# Altium PCB Right_Board.PcbDoc (part 1 of 2)
Units mm, origin at the board's own origin, x right, y up, seen from the top; angles counter-clockwise.
Board outline 34.7 x 82.01 mm, 6 copper layers (Top Layer, Layer 2, Layer 3, Layer 4, Layer 5, Bottom Layer), stack 1.538 mm thick; 65 components, 45 nets, 288 pads, 262 vias.
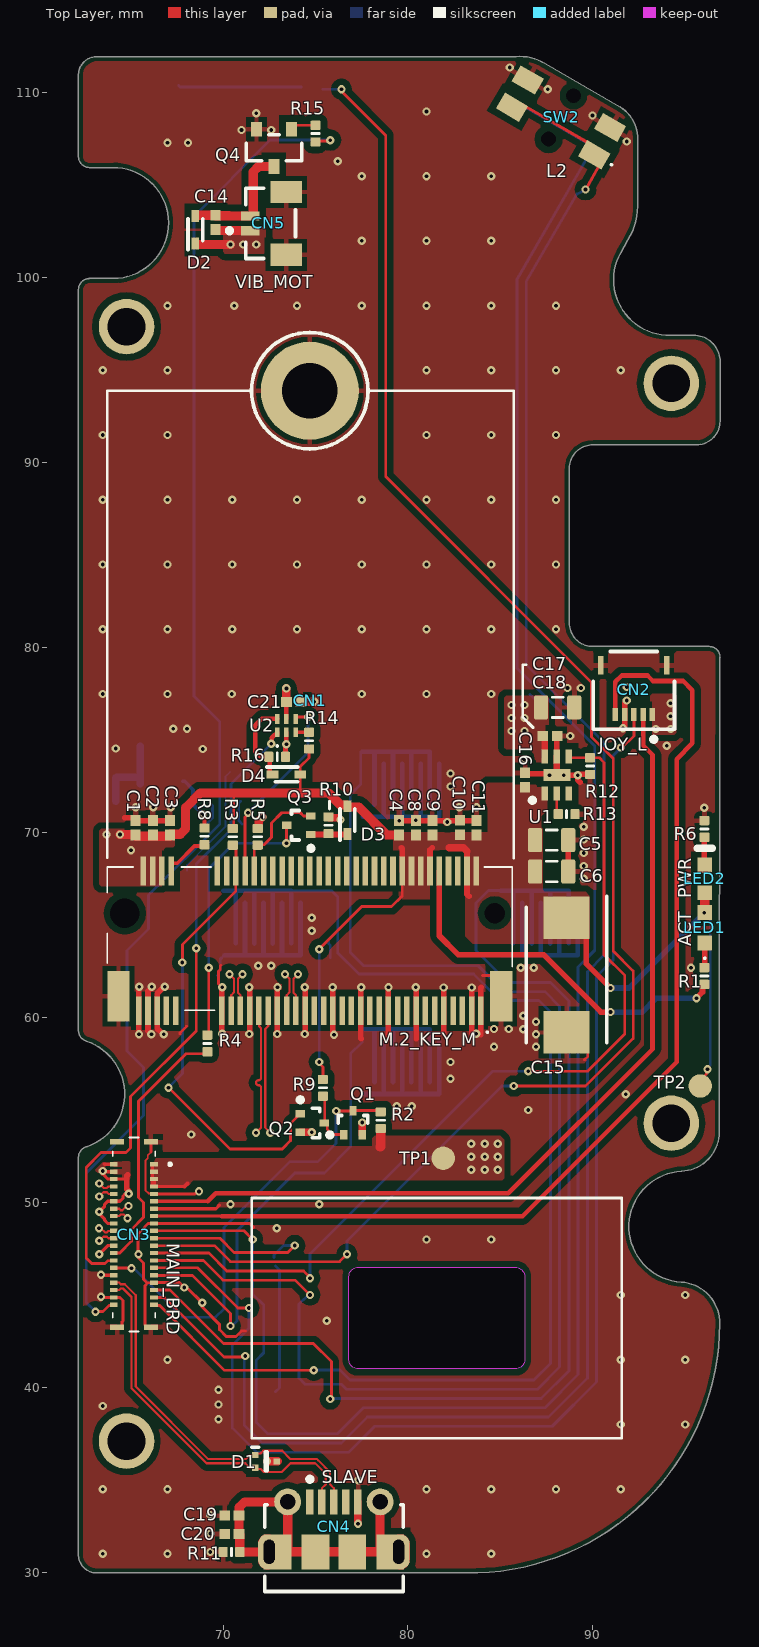
[diagram p0: Top Layer view]
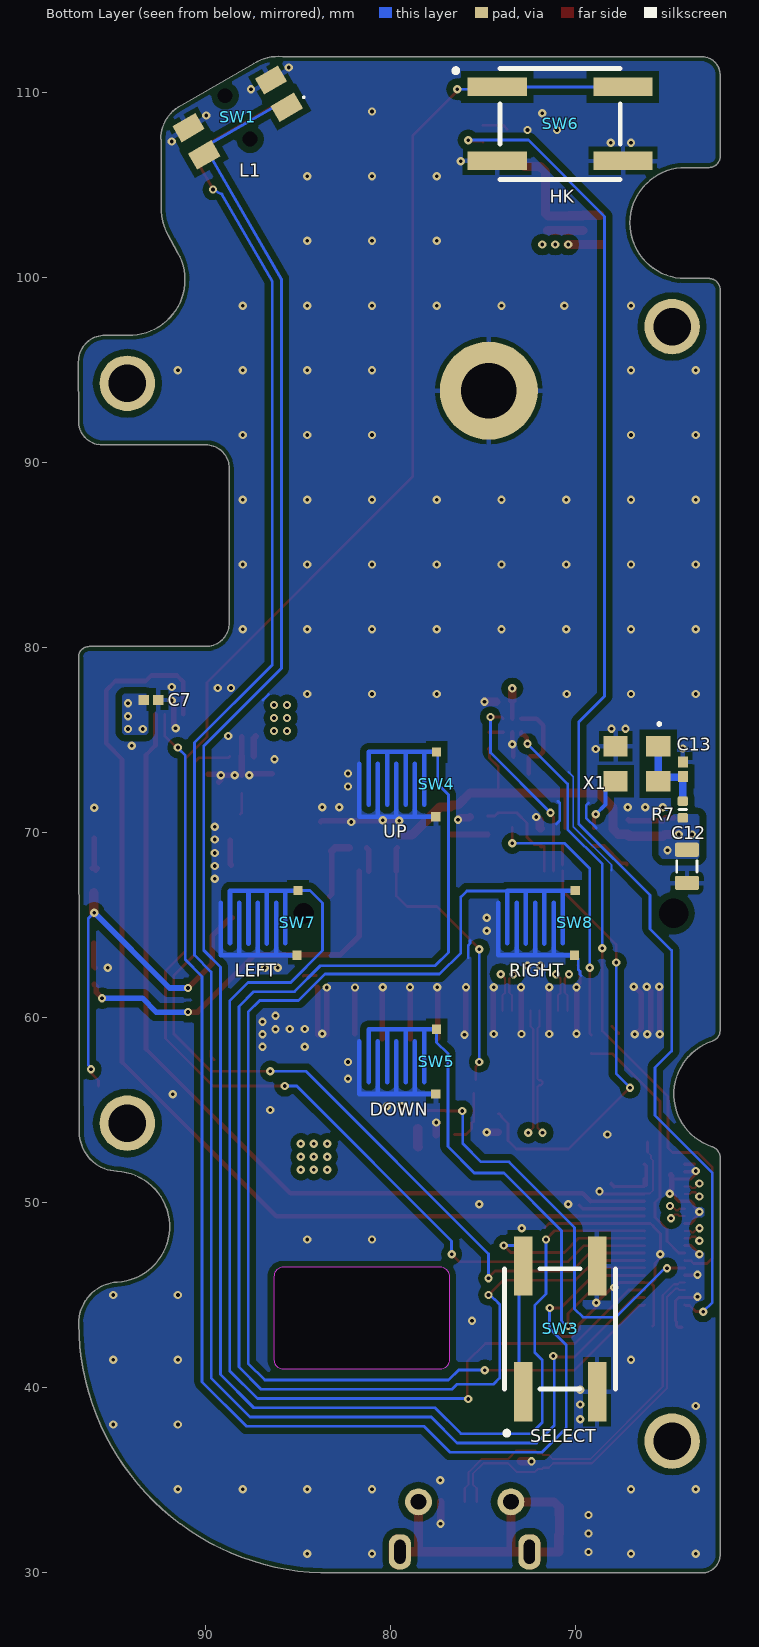
[diagram p1: Bottom Layer view, seen from below]
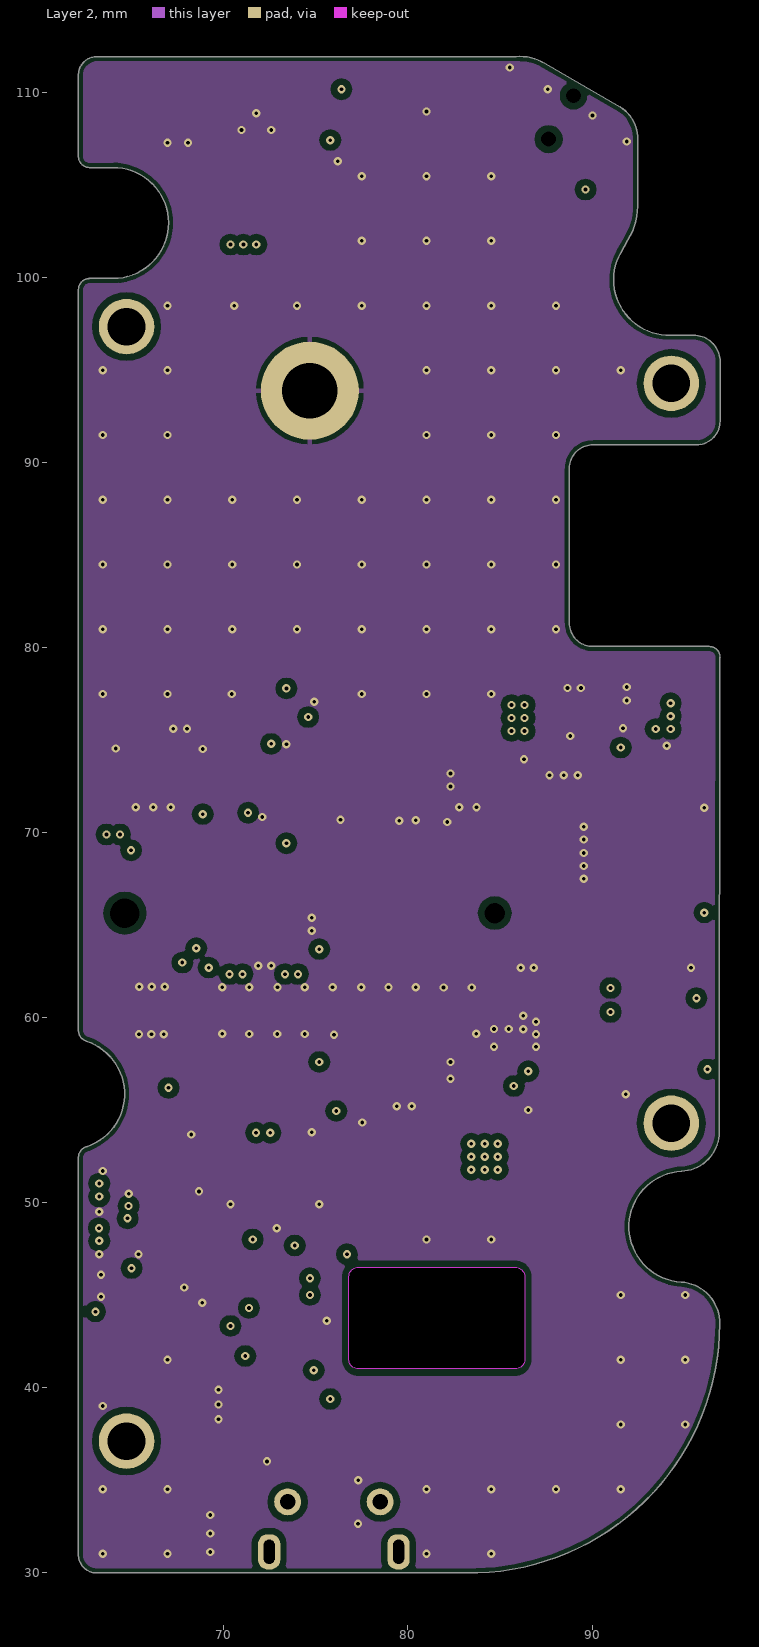
[diagram p2: Layer 2]
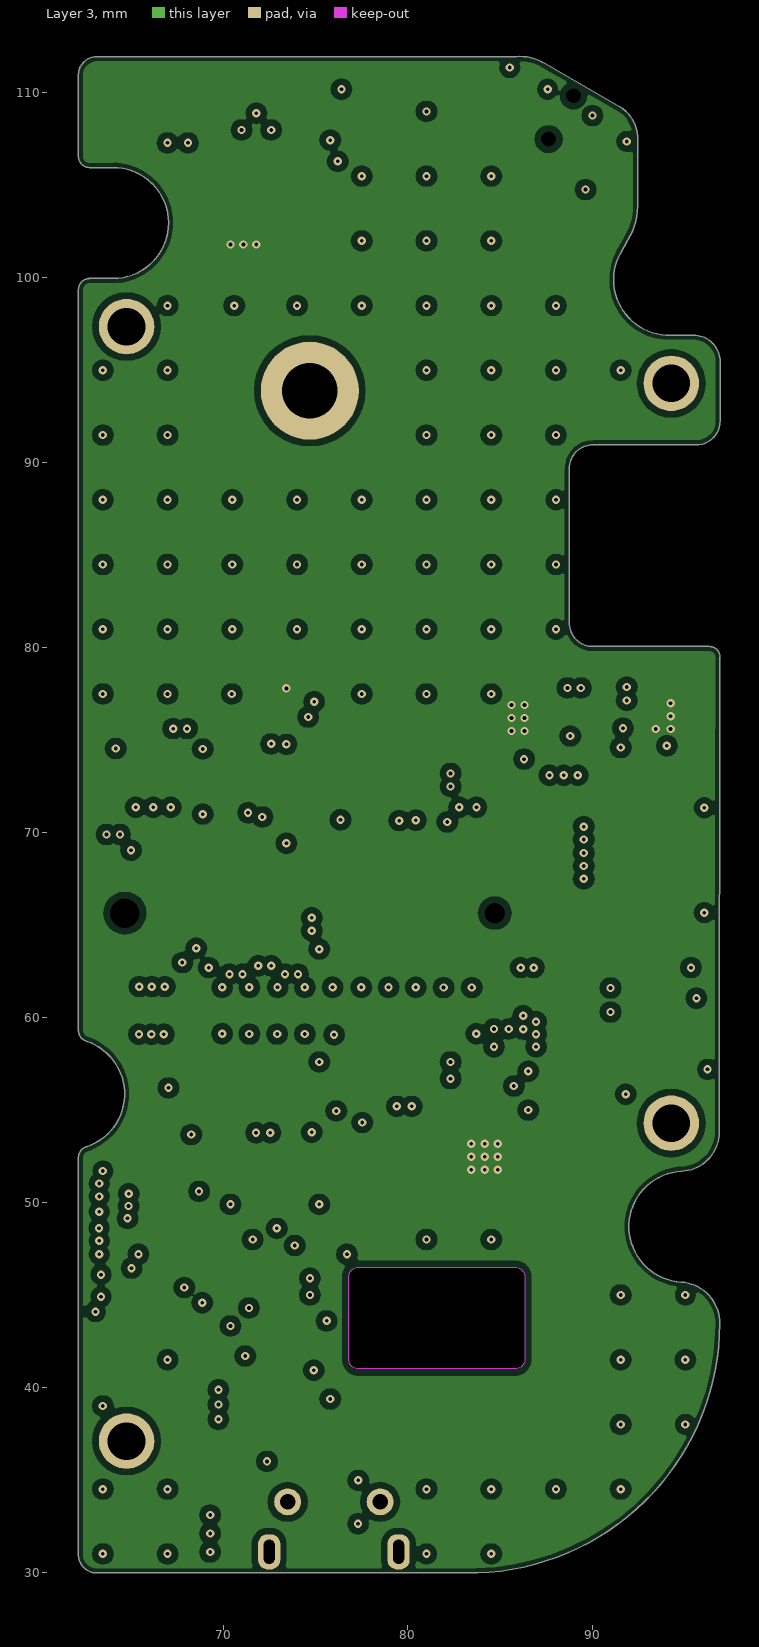
[diagram p3: Layer 3]
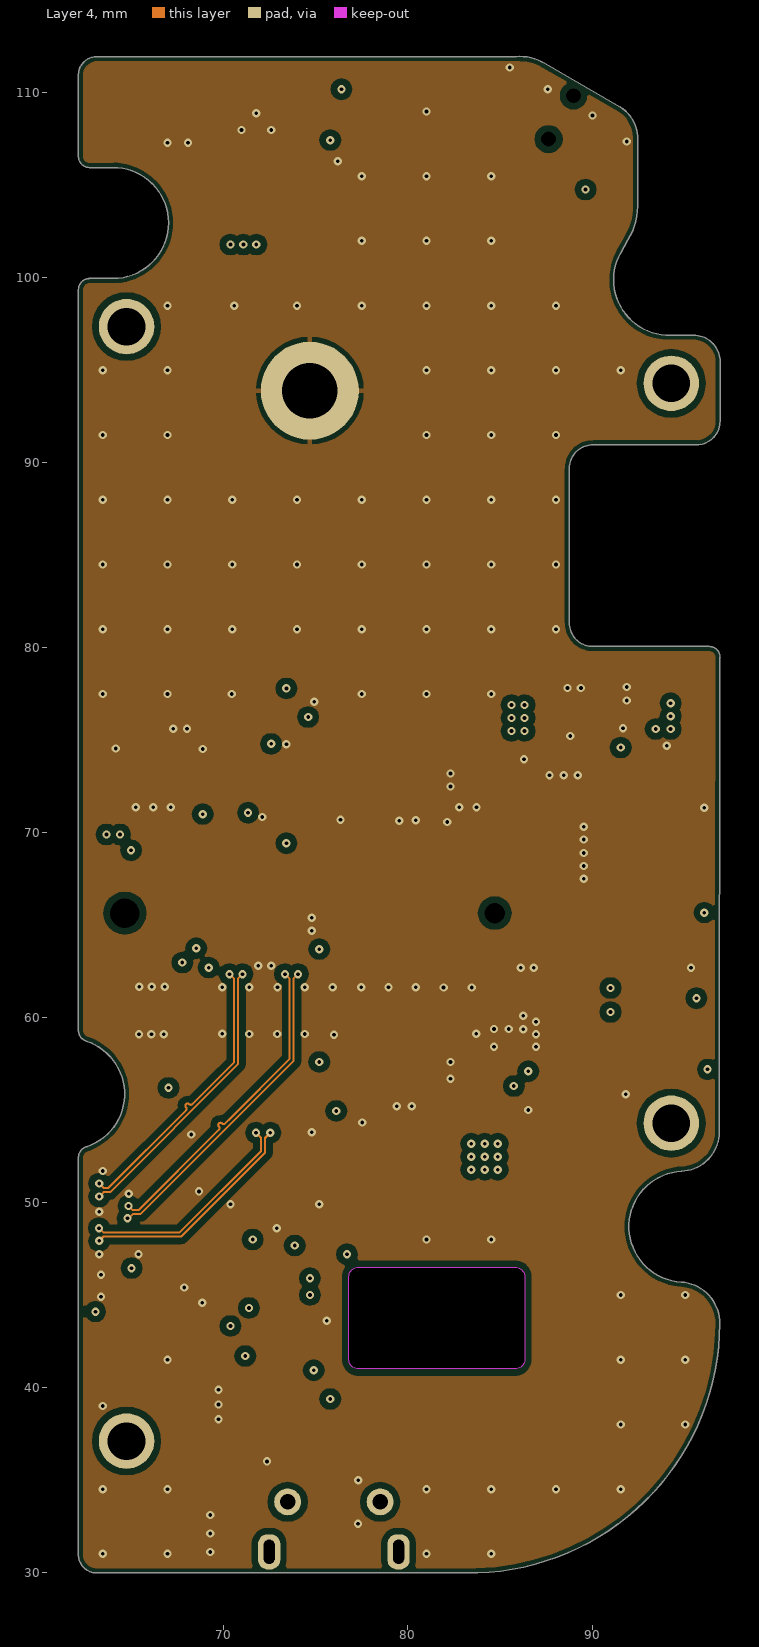
[diagram p4: Layer 4]
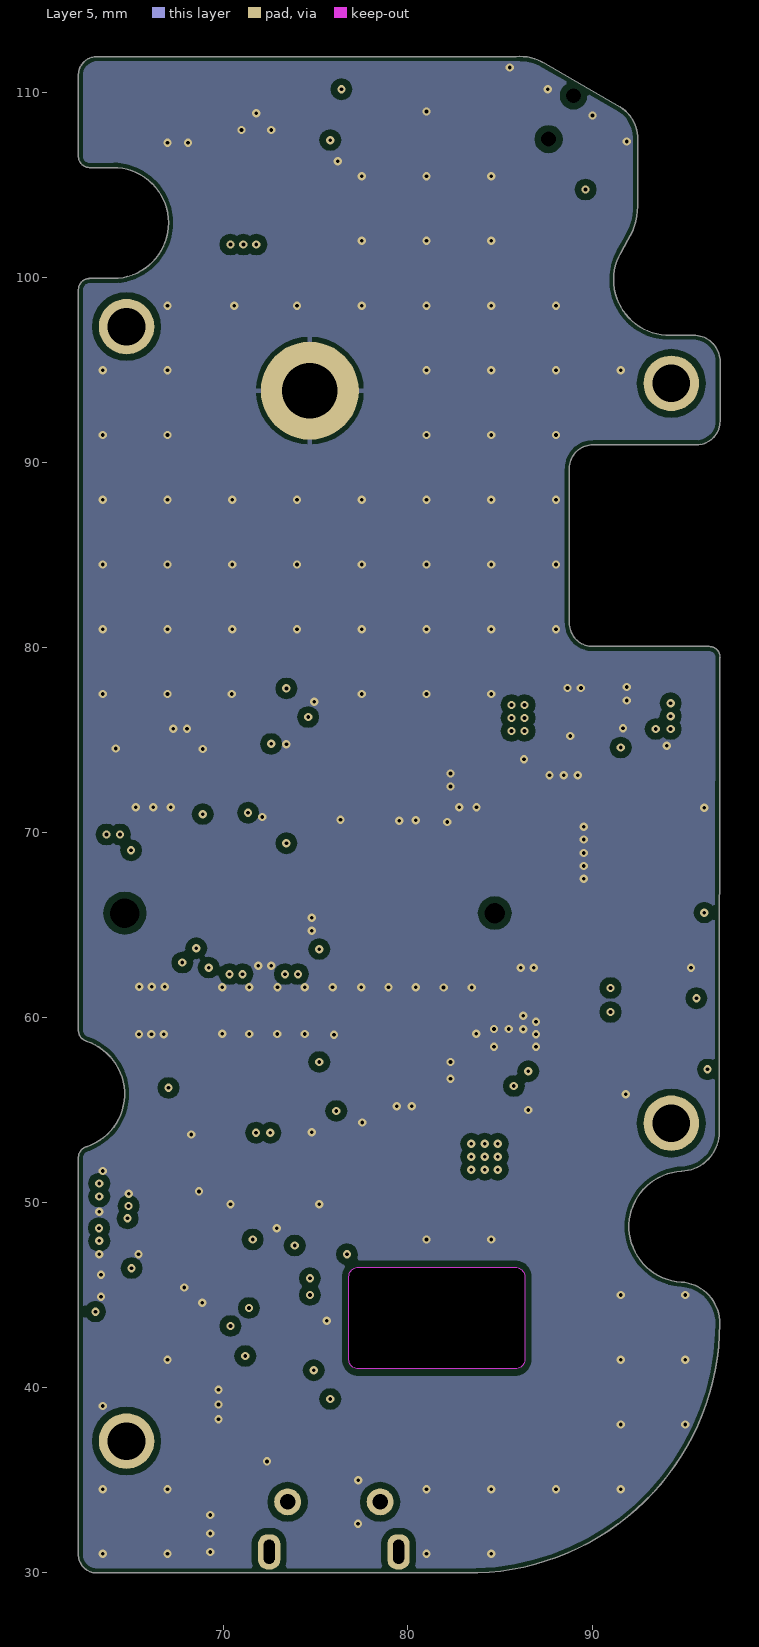
[diagram p5: Layer 5]
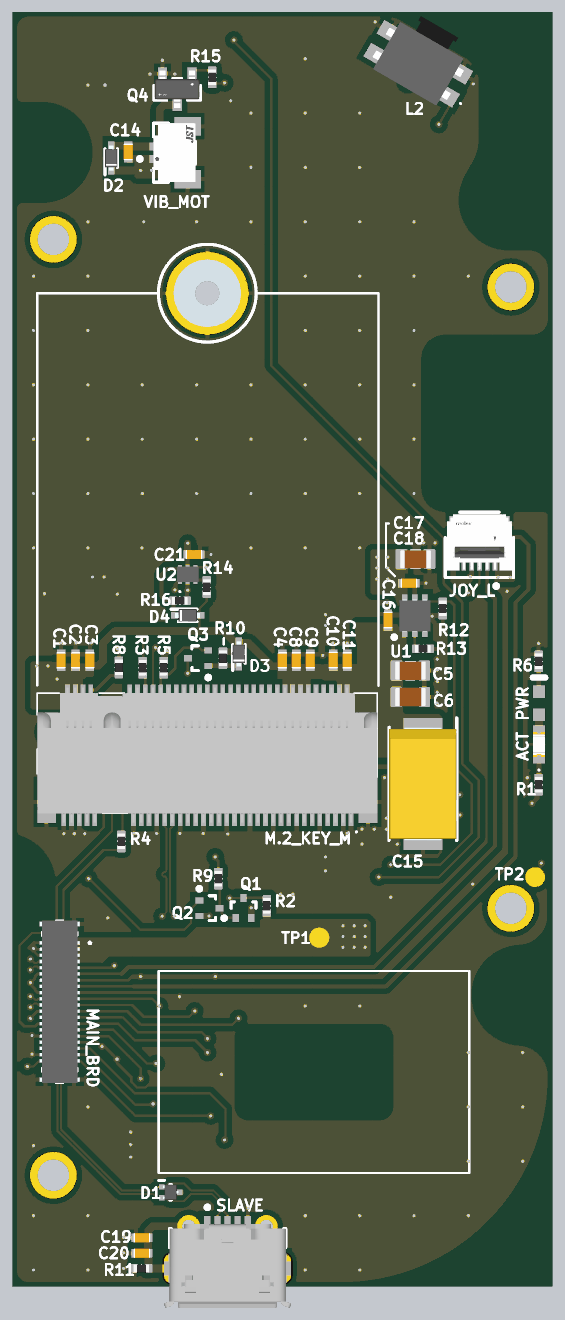
[diagram p7: 3D render of the assembled board from above, using the file's embedded part models]
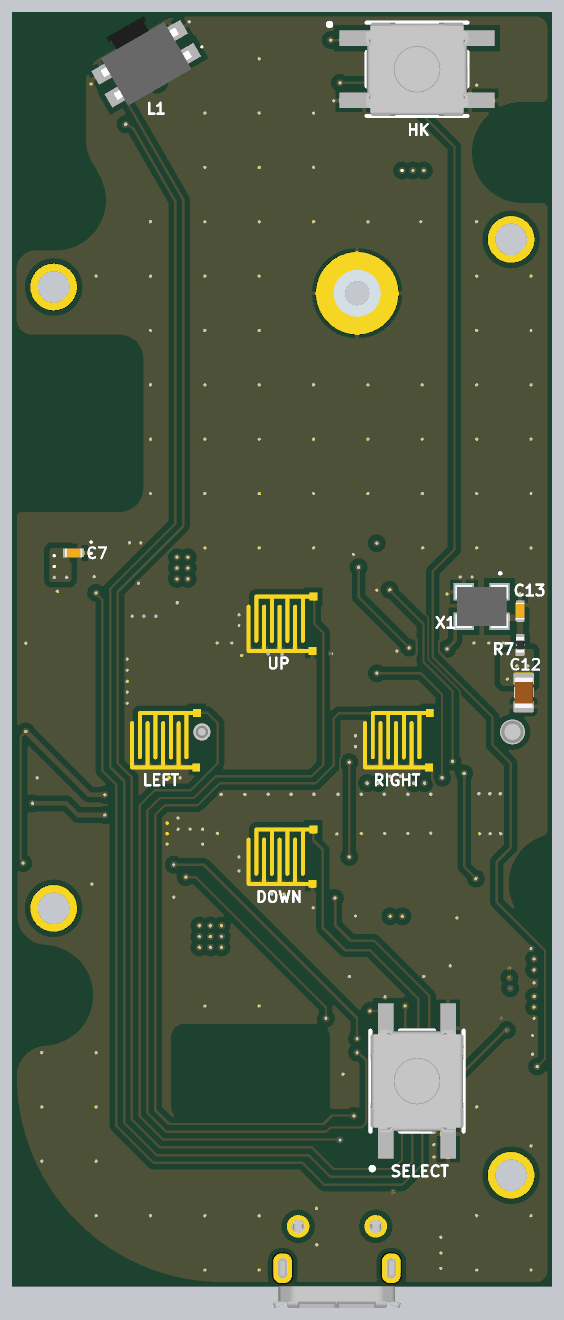
[diagram p8: 3D render of the assembled board from below, using the file's embedded part models]

## Layer stack, top to bottom
Top Solder: solder mask 0.0305, Solder Resist, Dk 3.8
Top Layer: signal copper 0.035
Dielectric 4: prepreg 0.0994, PP-015, Dk 4.1
Layer 2: signal copper 0.0152
Dielectric 2: core 0.55, Core-037, Dk 4.6
Layer 3: signal copper 0.0152
Dielectric 1: prepreg 0.1088, PP-016, Dk 4.1
Layer 4: signal copper 0.0152
Dielectric 3: core 0.55, Core-037, Dk 4.6
Layer 5: signal copper 0.0152
Dielectric 5: prepreg 0.0994, PP-015, Dk 4.1
Bottom Layer: signal copper 0.035
Bottom Solder: solder mask 0.0305, Solder Resist, Dk 3.8

## Board outline
62.181,52.466 cw(c62.785,52.435) 62.636,53.021 62.635,53.022 ccw(c61.679,55.866) 62.605,58.719 62.607,58.725 cw(c62.787,59.302) 62.183,59.268 62.179,59.272 62.179,99.381 cw(c62.784,99.36) 62.75,99.964 62.75,99.966 64.081,99.966 ccw(c64.054,102.966) 64.049,105.966 62.762,105.966 cw(c62.783,106.571) 62.179,106.537 62.179,111.004 62.18,111.004 cw(c63.179,110.967) 63.123,111.965 83.46,111.965 85.841,111.965 cw(c86.065,109.455) 87.399,111.593 91.47,109.242 cw(c90.401,107.53) 92.419,107.483 92.413,107.482 92.413,103.876 cw(c89.092,103.842) 91.884,102.043 91.882,102.044 91.499,101.355 ccw(c94.122,99.899) 94.206,96.9 94.206,96.899 95.442,96.899 cw(c95.442,95.461) 96.88,95.461 96.874,92.242 cw(c95.604,92.242) 95.604,90.972 89.992,90.972 ccw(c89.992,89.702) 88.722,89.703 88.722,81.338 ccw(c89.992,81.338) 89.992,80.068 96.291,80.067 cw(c96.297,79.49) 96.874,79.496 96.864,79.49 96.836,53.815 96.836,53.811 cw(c94.7,53.824) 94.785,51.69 94.79,51.69 ccw(c94.946,48.695) 94.78,45.699 94.783,45.699 cw(c94.626,43.468) 96.862,43.443 96.862,43.444 cw(c83.315,43.512) 83.133,29.966 63.14,29.966 cw(c63.177,30.965) 62.179,30.909 62.181,30.912
cut-out: 76.807,45.992 cw(c77.315,45.992) 77.315,46.5 85.799,46.5 cw(c85.799,45.992) 86.307,45.992 86.307,41.508 cw(c85.799,41.508) 85.799,41 77.315,41 cw(c77.315,41.508) 76.807,41.508

## Design rules (kind name [scope] priority, off if disabled: settings)
BoardOutlineClearance [All] p1: gap=0.254 ignorepadtopadclearanceinfootprint=FALSE except(0: Arc-OutlineEdge Arc-SplitContinuation Track-OutlineEdge Track-SplitContinuation SMDPad-OutlineEdge SMDPad-SplitContinuation THPad-SplitContinuation Via-OutlineEdge Via-SplitContinuation Fill-SplitContinuation Poly-SplitContinuation Region-OutlineEdge Region-SplitContinuation Text-OutlineEdge Text-SplitContinuation; 0.2: THPad-OutlineEdge)
Clearance [All] p1: gap=0.2 ignorepadtopadclearanceinfootprint=FALSE except(0.02: Fill-Hole; 0.09: Arc-Arc Arc-Track Track-Track; 0.127: SMDPad-SMDPad; 0.35: Arc-Fill Arc-Poly Arc-Region Track-Fill Track-Poly Track-Region SMDPad-Fill SMDPad-Poly SMDPad-Region THPad-Fill THPad-Poly THPad-Region Via-Fill Via-Poly Via-Region Fill-Fill Fill-Poly Fill-Region Poly-Poly Poly-Region Poly-Hole Region-Region)
ComponentClearance [All] p1: gap=0.15 collisioncheckmode=3 verticalgap=0.254 showdistances=FALSE
DiffPairsRouting PCIE [InDifferentialPairClass('PCIe Gen 3x1')] p1: maxlimit=0.254 minlimit=0.11 mostfreqgap=0.11 toplayer_maxgap=0.11 toplayer_minwidth=0.118 toplayer_maxwidth=0.118 toplayer_prefwidth=0.118 midlayer1_mingap=0.254 midlayer1_prefgap=0.254 midlayer1_minwidth=0.381 midlayer1_maxwidth=0.381 midlayer1_prefwidth=0.381 midlayer2_maxgap=0.11 midlayer2_minwidth=0.11 midlayer2_maxwidth=0.11 midlayer2_prefwidth=0.11 midlayer3_maxgap=0.11 midlayer3_minwidth=0.11 midlayer3_maxwidth=0.11 midlayer3_prefwidth=0.11 midlayer4_mingap=0.254 midlayer4_prefgap=0.254 midlayer4_minwidth=0.381 midlayer4_maxwidth=0.381 midlayer4_prefwidth=0.381 bottomlayer_maxgap=0.11 bottomlayer_minwidth=0.118 bottomlayer_maxwidth=0.118 bottomlayer_prefwidth=0.118 maxuncoupledlength=12.7
DiffPairsRouting HDMI_1 [InDifferentialPairClass('HDMI')] p2: maxlimit=0.254 minlimit=0.172 mostfreqgap=0.254 toplayer_maxgap=0.172 toplayer_prefgap=0.172 toplayer_minwidth=0.116 toplayer_maxwidth=0.116 toplayer_prefwidth=0.116 midlayer1_mingap=0.254 midlayer1_minwidth=0.381 midlayer1_maxwidth=0.381 midlayer1_prefwidth=0.381 midlayer2_mingap=0.174 midlayer2_maxgap=0.174 midlayer2_prefgap=0.174 midlayer2_minwidth=0.106 midlayer2_maxwidth=0.106 midlayer2_prefwidth=0.106 midlayer3_mingap=0.254 midlayer3_minwidth=0.381 midlayer3_maxwidth=0.381 midlayer3_prefwidth=0.381 midlayer4_mingap=0.254 midlayer4_minwidth=0.381 midlayer4_maxwidth=0.381 midlayer4_prefwidth=0.381 bottomlayer_maxgap=0.172 bottomlayer_prefgap=0.172 bottomlayer_minwidth=0.116 bottomlayer_maxwidth=0.116 bottomlayer_prefwidth=0.116 maxuncoupledlength=12.7
DiffPairsRouting USB [InDifferentialPairClass('USB 2.0')] p3: maxlimit=0.254 minlimit=0.11 mostfreqgap=0.254 toplayer_maxgap=0.11 toplayer_prefgap=0.11 toplayer_minwidth=0.118 toplayer_maxwidth=0.118 toplayer_prefwidth=0.118 midlayer1_mingap=0.254 midlayer1_minwidth=0.381 midlayer1_maxwidth=0.381 midlayer1_prefwidth=0.381 midlayer2_maxgap=0.11 midlayer2_prefgap=0.11 midlayer2_minwidth=0.11 midlayer2_maxwidth=0.11 midlayer2_prefwidth=0.11 midlayer3_mingap=0.254 midlayer3_minwidth=0.381 midlayer3_maxwidth=0.381 midlayer3_prefwidth=0.381 midlayer4_mingap=0.254 midlayer4_minwidth=0.381 midlayer4_maxwidth=0.381 midlayer4_prefwidth=0.381 bottomlayer_maxgap=0.11 bottomlayer_prefgap=0.11 bottomlayer_minwidth=0.118 bottomlayer_maxwidth=0.118 bottomlayer_prefwidth=0.118 maxuncoupledlength=12.7
HoleSize [All] p1: absolutevalues=TRUE maxlimit=3 minlimit=0.025 maxpercent=80.000 minpercent=20.000
HoleToHoleClearance [All] p1: gap=0.3 allowstackedmicrovias=TRUE
MatchedLengths PCIE_1 [InDifferentialPairClass('PCIe Gen 3x1')] p1: tolerance=0.127 checknetsindiffpair=TRUE checkdiffpairvsdiffpair=FALSE checkxsignals=FALSE checkothers=FALSE
MatchedLengths HDMI [InDifferentialPairClass('HDMI')] p2: tolerance=1.27 checknetsindiffpair=TRUE checkdiffpairvsdiffpair=FALSE checkxsignals=FALSE checkothers=FALSE
MatchedLengths "USB 2.0" [InDifferentialPairClass('USB 2.0')] p3: tolerance=1.27 checknetsindiffpair=TRUE checkdiffpairvsdiffpair=FALSE checkxsignals=FALSE checkothers=FALSE
MinimumSolderMaskSliver [All] p1: minsoldermaskwidth=0.1
PlaneClearance [All] p1: clearance=0.4
PolygonConnect GND [InNet('GND')] p1: thpad.connectstyle=Relief thpad.reliefconductorwidth=0.254 thpad.reliefentries=4 thpad.polygonreliefangle="90 Angle" thpad.airgapwidth=0.254 smdpad.connectstyle=Relief smdpad.reliefconductorwidth=0.254 smdpad.reliefentries=4 smdpad.polygonreliefangle="90 Angle" smdpad.airgapwidth=0.254 via.connectstyle=Direct via.reliefconductorwidth=0.254 via.reliefentries=4 via.polygonreliefangle="90 Angle" via.airgapwidth=0.254
PolygonConnect Other [All] p2: connectstyle=Direct reliefconductorwidth=0.254 reliefentries=4 polygonreliefangle="90 Angle" airgapwidth=0.254
RoutingCorners [All] p1: cornerstyle=Round minsetback=2.54 maxsetback=2.54
RoutingVias [All] p1: holewidth=0.2 width=0.45 viastyle="Through Hole" minholewidth=0.2 minwidth=0.45 maxholewidth=0.305 maxwidth=0.61
SilkToSilkClearance [All] p1: silktosilkclearance=0.05
SilkToSolderMaskClearance [IsPad] p1: minsilkscreentomaskgap=0.08 clearancetoexposedcopper=TRUE
SolderMaskExpansion [All] p1: expansion=0.01 istentingtop=FALSE
UnRoutedNet [All] p1: checkbadconnections=TRUE
Width [All] p1: maxlimit=4 minlimit=0.09 preferedwidth=0.175 toplayer_prefwidth=0.15 bottomlayer_prefwidth=0.15 minimp=50.000000 maximp=50.000000 favimp=50.000000
20 further rules are at their usual default settings.

## Classes and differential pairs
differential pair class "USB 2.0": E2
differential pair class "PCIe Gen 3x1": PCIE_CLK PCIE_RX PCIE_TX
differential pair PCIE_TX: +PCIE_TX_P -PCIE_TX_N
differential pair PCIE_RX: +PCIE_RX_P -PCIE_RX_N
differential pair PCIE_CLK: +PCIE_CLK_P -PCIE_CLK_N
differential pair E2: +E2_P -E2_N

## Components (designator, comment, footprint, x,y, rotation, side; value= is the part's Value field where it differs from the comment)
C1 "0.1uF" CAPC1005X56X25LL10T15 65.275,70.265 r90 top
C2 "0.1uF" CAPC1005X56X25LL10T15 66.2,70.265 r90 top
C3 "0.1uF" CAPC1005X56X25LL10T15 67.125,70.265 r90 top
C4 "0.1uF" CAPC1005X56X25LL10T15 79.525,70.265 r90 top
C5 "10uF" CAPC0805(2012)145_L 87.775,69.6 r0 top value=10µF
C6 "10uF" CAPC0805(2012)145_L 87.775,67.9 r0 top value=10µF
C7 "0.1uF" CAPC1005X56X25LL10T15 92.95,77.175 r180 bottom
C8 "0.1uF" CAPC1005X56X25LL10T15 80.425,70.265 r90 top
C9 "0.1uF" CAPC1005X56X25LL10T15 81.325,70.265 r90 top
C10 "0.1uF" CAPC1005X56X25LL10T15 82.8,70.275 r90 top
C11 "0.1uF" CAPC1005X56X25LL10T15 83.7,70.265 r90 top
C12 "10uF" CAPC0805(2012)145_L 63.975,68.175 r270 bottom value=10µF
C13 "0.1uF" CAPC1005X56X25LL10T15 64.2,73.425 r90 bottom
C14 "0.1uF" CAPC1005X56X25LL10T15 69.6,103 r90 top
C15 "150uF" CAPPM7344X310N 88.575,62.3 r270 top
C16 "0.1uF" CAPC1005X56X25LL10T15 86.325,72.85 r90 top
C17 "0.1uF" CAPC1005X56X25LL10T15 87.675,75.225 r0 top
C18 "10uF" CAPC0805(2012)145_L 88.1,76.775 r0 top value=10µF
C19 "0.1uF" CAPC1005X56X25LL10T15 70.475,33.075 r180 top
C20 "0.001uF" CAPC1005X56X25LL10T15 70.475,32.075 r180 top value=0.1uF
C21 "0.1uF" CAPC1005X56X25LL10T15 73.825,77.075 r0 top
CN1 "M.2_KEY_M" 121991196 74.79,78.624 r180 top locked
CN2 "JOY_L" FP-503480-0540-MFG 92.214,77.694 r180 top locked
CN3 "MAIN_BRD" BM20B0840DS04V51 65.182,48.266 r90 top locked
CN4 "SLAVE" 105017-0001 75.992,32.461 r0 top
CN5 "VIB_MOT" FP-SM02B-SURS-TF_LF_SN-MFG 72.571,102.947 r90 top
D1 "TPD2E009DRTR" SOTFL35P100X50-3N 72.325,36.004 r0 top
D2 "1SS400T1G" SODFL1608X70N 68.5,102.6 r90 top
D3 "1SS400T1G" SODFL1608X70N 76.725,70.675 r90 top
D4 "1SS400T1G" SODFL1608X70N 73.425,73.15 r0 top
LED1 "ACT" LED_0603 96.05,64.85 r0 top
LED2 "PWR" EVRL-0603-2_V 96.05,67.5 r90 top
Q1 "DMG1012T-7" DIOD-SOT523-3_V 77.024,54.307 r90 top
Q2 "DMG1012T-7" DIOD-SOT523-3_V 74.825,54.3 r0 top
Q3 "DMG1012T-7" DIOD-SOT523-3_V 74.1,70.4 r180 top
Q4 "SS8050-G" FP-SS8050-G-MFG 72.751,107.031 r270 top
R1 "1k" RESC0402(1005)_L 96.025,62.25 r90 top
R2 "2.2k" RESC0402(1005)_L 78.525,54.45 r90 top
R3 "10k" RESC0402(1005)_L 70.525,69.775 r270 top
R4 "33R" RESC0402(1005)_L 69.15,58.6 r270 top
R5 "2.2k" RESC0402(1005)_L 71.875,69.775 r90 top
R6 "1k" RESC0402(1005)_L 96.025,70.2 r270 top
R7 "1R" RESC0402(1005)_L 64.2,71.25 r90 bottom
R8 "33R" RESC0402(1005)_L 69,69.8 r270 top
R9 "10k" RESC0402(1005)_L 75.4,56.2 r270 top
R10 "10k" RESC0402(1005)_L 75.7,70.4 r90 top
R11 "1M" RESC0402(1005)_L 70.45,31.1 r180 top
R12 "100k" RESC0402(1005)_L 89.85,73.6 r90 top
R13 "10k" RESC0402(1005)_L 88.575,71 r0 top
R14 "10k" RESC0402(1005)_L 74.65,74.975 r270 top
R15 "1k" RESC0402(1005)_L 75,107.8 r90 top
R16 "10k" RESC0402(1005)_L 72.925,74.1 r0 top
SW1 "L1" APTCLGTVTR 88.275,108.675 r330 bottom
SW2 "L2" APTCLGTVTR_No_Holes 88.275,108.675 r150 top locked
SW3 "SELECT" EVQQ2 70.836,43.166 r90 bottom locked
SW4 "UP" L4.0-W4.0-CNDV-PAD#1 79.936,72.616 r180 bottom locked
SW5 "DOWN" L4.0-W4.0-CNDV-PAD#2 79.936,57.616 r180 bottom locked
SW6 "HK" EVQQ2 70.836,108.323 r180 bottom locked
SW7 "LEFT" L4.0-W4.0-CNDV-PAD#3 87.436,65.116 r180 bottom locked
SW8 "RIGHT" L4.0-W4.0-CNDV-PAD#4 72.436,65.116 r180 bottom locked
TP1 "3V3" TP 81.9,52.4 r0 top
TP2 "3V3M2" TP 95.8,56.3 r0 top
U1 "AP22653FDZ-7" SON65P200X200X80-7N-D 88.05,73.125 r90 top
U2 "74LVC1G3157FZ4-7" 74LVC1G3157FZ47 73.425,75.788 r0 top
X1 "ECS-327KE-TR" ECS327KETR 66.675,73.725 r0 bottom

## Footprints (in the part's own frame and the unit in brackets; to place one, negate y for a bottom-side part, rotate by r counter-clockwise, add the part's x,y. Pads: shape width x height; smd on the part's side, far side on the other; paste and mask are expansions set on the pad)
74LVC1G3157FZ47 [mm]
  rect 0.25x0.525 smd: 1(-0.5,-0.363) 2(0,-0.363) 3(0.5,-0.363) 4(0.5,0.363) 5(0,0.363) 6(-0.5,0.363)
  silkscreen extent -0.55,-1.15 -0.45,-1.05, body extent -0.7,-0.5 0.7,0.5, height 0.5
105017-0001 [mm]
  rect 0.4x1.35 smd: 1(-1.3,1.35) 2(-0.65,1.35) 3(0,1.35) 4(0.65,1.35) 5(1.3,1.35)
  round 1.45 hole 0.85: 6(-2.5,1.35)
  round 1.45 hole 0.85 paste+0: 7(2.5,1.35)
  rrect84% 1.2x1.9 hole 0.6 slot 1.3 at 90 deg mask+0.102: 8(-3.5,-1.35) 11(3.5,-1.35)
  rect 1.5x1.9 smd: 8(-3.05,-1.35) 9(-1,-1.35) 10(1,-1.35) 11(3.05,-1.35)
  Top Layer circle w0.5: c3.6,-0.9 r0.25
  Top Layer circle w0.5: c3.6,-1.8 r0.25
  Top Layer circle w0.5: c-3.6,-0.9 r0.25
  Top Layer circle w0.5: c-3.6,-1.8 r0.25
  Top Layer region: 3.6,-0.9 3.6,-1.8 4.1,-1.8 4.1,-0.9
  Top Layer region: -3.6,-1.8 -3.6,-0.9 -4.1,-0.9 -4.1,-1.8
  silkscreen extent -3.75,-3.5 3.75,2.7, body extent -4.1,-3.9 4.1,1.5, height 2.67
121991196 [mm]
  rect 0.3x1.55 smd: 1(-9.15,18.25) 2(-8.9,10.7) 3(-8.65,18.25) 4(-8.4,10.7) 5(-8.15,18.25) 6(-7.9,10.7) 7(-7.65,18.25) 8(-7.4,10.7) 9(-7.15,18.25) 10(-6.9,10.7) 11(-6.65,18.25) 12(-6.4,10.7) 13(-6.15,18.25) 14(-5.9,10.7) 15(-5.65,18.25) 16(-5.4,10.7) 17(-5.15,18.25) 18(-4.9,10.7) 19(-4.65,18.25) 20(-4.4,10.7) 21(-4.15,18.25) 22(-3.9,10.7) 23(-3.65,18.25) 24(-3.4,10.7) 25(-3.15,18.25) 26(-2.9,10.7) 27(-2.65,18.25) 28(-2.4,10.7) 29(-2.15,18.25) 30(-1.9,10.7) 31(-1.65,18.25) 32(-1.4,10.7) 33(-1.15,18.25) 34(-0.9,10.7) 35(-0.65,18.25) 36(-0.4,10.7) 37(-0.15,18.25) 38(0.1,10.7) 39(0.35,18.25) 40(0.6,10.7) 41(0.85,18.25) 42(1.1,10.7) 43(1.35,18.25) 44(1.6,10.7) 45(1.85,18.25) 46(2.1,10.7) 47(2.35,18.25) 48(2.6,10.7) 49(2.85,18.25) 50(3.1,10.7) 51(3.35,18.25) 52(3.6,10.7) 53(3.85,18.25) 54(4.1,10.7) 55(4.35,18.25) 56(4.6,10.7) 57(4.85,18.25) 58(5.1,10.7) 67(7.35,18.25) 68(7.6,10.7) 69(7.85,18.25) 70(8.1,10.7) 71(8.35,18.25) 72(8.6,10.7) 73(8.85,18.25) 74(9.1,10.7) 75(9.35,18.25)
  round 0.55 hole 1.1 unplated mask+0.038: MH1(-9.9,12.975)
  round 0.8 hole 1.6 unplated mask+0.038: MH2(10.1,12.975)
  rect 1.2x2.75 smd: MP1(-10.25,17.474) MP2(10.45,17.474)
  round 5.3 hole 3 mask+0.038: MP3(0.1,-15.275)
  silkscreen extent -10.93,-18.42 11.05,19.46, body extent -10.85,-17.44 11.05,18.82, height 3.08
APTCLGTVTR [mm]
  rect 1.45x1 smd: 1(-2.575,0.85) 2(-2.575,-0.85) 3(2.575,0.85) 4(2.575,-0.85)
  round 0.4 hole 0.8 unplated mask+0.038: MH1(0,1.35) MH2(0,-1.35)
  silkscreen extent -3.69,0.8 -3.59,0.9, body extent -2.77,-2.75 2.77,1.75, height 1.67
APTCLGTVTR_No_Holes [mm]
  rect 1.45x1 smd: 1(-2.574,0.85) 2(-2.574,-0.85) 3(2.576,0.85) 4(2.576,-0.85)
  silkscreen extent -3.69,0.8 -3.59,0.9, body extent -2.77,-2.75 2.77,1.75, height 1.67
BM20B0840DS04V51 [mm]
  rect 0.23x0.42 smd: 1(3.8,-1.09) 2(3.8,1.09) 3(3.4,-1.09) 4(3.4,1.09) 5(3,-1.09) 6(3,1.09) 7(2.6,-1.09) 8(2.6,1.09) 9(2.2,-1.09) 10(2.2,1.09) 11(1.8,-1.09) 12(1.8,1.09) 13(1.4,-1.09) 14(1.4,1.09) 15(1,-1.09) 16(1,1.09) 17(0.6,-1.09) 18(0.6,1.09) 19(0.2,-1.09) 20(0.2,1.09) 21(-0.2,-1.09) 22(-0.2,1.09) 23(-0.6,-1.09) 24(-0.6,1.09) 25(-1,-1.09) 26(-1,1.09) 27(-1.4,-1.09) 28(-1.4,1.09) 29(-1.8,-1.09) 30(-1.8,1.09) 31(-2.2,-1.09) 32(-2.2,1.09) 33(-2.6,-1.09) 34(-2.6,1.09) 35(-3,-1.09) 36(-3,1.09) 37(-3.4,-1.09) 38(-3.4,1.09) 39(-3.8,-1.09) 40(-3.8,1.09)
  rect 0.3x0.75 smd: MP1(5.01,-0.925) MP2(5.01,0.925) MP3(-5.01,-0.925) MP4(-5.01,0.925)
  silkscreen extent -5.25,-2 5.25,1.15, body extent -5.24,-1.28 5.24,1.28, height 1
CAPC0805(2012)145_L [mm] "Chip Capacitor, Body 2.0x1.2mm, Height 1.45mm, IPC High Density"
  rrect25% 0.76x1.3 smd: 1(-0.9,0) 2(0.89,0)
  silkscreen extent -0.3,-0.55 0.3,0.55, body extent -1,-0.6 1,0.6, height 1.45
CAPC1005X56X25LL10T15 [mm] "Chip Capacitor, 2-Leads, Body 1.10x0.60mm, IPC High Density"
  rect 0.58x0.54 smd: 1(-0.39,0) 2(0.39,0)
  body extent -0.55,-0.3 0.55,0.3, height 0.56
CAPPM7344X310N [mm]
  rect 2.3x2.5 smd: 1(-3.1,0) 2(3.1,0)
  silkscreen extent -4.25,-2.17 3.65,2.17, body extent -3.65,-2.17 3.65,2.17, height 3.1
DIOD-SOT523-3_V [mm] "SOT523, 3-Leads, Body 1.6x0.8mm, Pitch 0.50mm"
  rect 0.51x0.4 smd: 1(-0.65,0.5) 2(-0.65,-0.5) 3(0.65,0)
  silkscreen extent -0.77,-0.8 0.4,1.37, body extent -0.4,-0.8 0.4,0.8, height 0.86
ECS327KETR [mm]
  rect 1.3x1.1 smd: 1(-1.15,-0.95) 2(1.15,-0.95) 3(1.15,0.95) 4(-1.15,0.95)
  silkscreen extent -1.25,-2.2 -1.15,-2.1, body extent -1.69,-1.39 1.69,1.39, height 1.1
EVQQ2 [mm]
  rect 3.2x1 smd: 1(-3.4,2) 2(-3.4,-2) 3(3.4,-2) 4(3.4,2)
  silkscreen extent -5.75,-3 3.25,3, body extent -3.3,-3 3.3,3, height 3.1
EVRL-0603-2_V [mm] "SMD, 2-Leads, Body 1.6x0.8mm"
  rect 0.8x0.8 smd: 1(-0.75,0) 2(0.75,0)
  silkscreen extent 1.65,-0.4 1.65,0.4, body extent -0.8,-0.4 0.8,0.4, height 0.5
FP-503480-0540-MFG [mm]
  rect 0.3x0.7 smd paste+0: 1(-1,1.3) 2(-0.5,1.3) 3(0,1.3) 4(0.5,1.3) 5(1,1.3)
  rect 0.3x1 smd paste+0: 6(-1.79,-1.35) 7(1.79,-1.35)
  silkscreen extent -2.2,-2.1 2.2,2.77, body extent -2.3,-2.2 2.3,2.2, height 0.25
FP-SM02B-SURS-TF_LF_SN-MFG [mm]
  rect 0.5x1 smd paste+0: 1(-0.4,1.1) 2(0.4,1.1)
  rect 1.2x1.7 smd paste+0: 3(-1.7,-0.85) 4(1.7,-0.85)
  silkscreen extent -1.9,-1.35 1.9,2.35, body extent -2.4,-1.8 2.4,1.7, height 0.25
FP-SS8050-G-MFG [mm]
  rect 0.8x0.6 smd paste+0: 1(-1.01,0.95) 2(-1.01,-0.95) 3(1.01,0)
  silkscreen extent -0.7,-1.5 0.7,1.5, body extent -1.51,-1.6 1.51,1.6, height 0.25
L4.0-W4.0-CNDV-PAD#1 [mm] "Conductive Pad Switch"
  rect 0.5x0.5 smd paste-2539.97: 1(2.425,1.75) 2(2.375,-1.75)
  Top Layer lines w0.25: 2.425,1.75 1.75,1.75 ; 2.375,-1.75 2.125,-1.75 1.25,-1.75 ; 1.75,-1.1 1.75,1.75 ; 1.25,1.1 1.25,-1.75 ; 0.75,-1.107 0.75,1.75 ; 0.25,1.1 0.25,-1.75 ; -0.25,-1.107 -0.25,1.75 ; -0.75,1.1 -0.75,-1.75 ; -1.25,-1.1 -1.25,1.75 -0.25,1.75 ; -1.75,1.1 -1.75,-1.75 -0.75,-1.75 ; 1.75,1.75 0.75,1.75 ; 1.25,-1.75 0.411,-1.75 0.25,-1.75 ; 0.75,1.75 -0.25,1.75 ; 0.25,-1.75 -0.489,-1.75 -0.75,-1.75
L4.0-W4.0-CNDV-PAD#2 [mm] "Conductive Pad Switch"
  rect 0.5x0.5 smd paste-2539.97: 1(2.425,1.75) 2(2.375,-1.75)
  Top Layer lines w0.25: 2.425,1.75 2.386,1.75 1.75,1.75 ; 2.375,-1.75 2.125,-1.75 -1.75,-1.75 -1.75,1.1 ; 1.75,-1.1 1.75,1.75 ; 1.25,-1.75 1.25,1.1 ; 0.75,-1.107 0.75,1.75 ; 0.25,-1.75 0.25,1.1 ; -0.25,-1.107 -0.25,1.75 ; -0.75,-1.75 -0.75,1.1 ; -1.25,-1.1 -1.25,1.75 -0.25,1.75 ; 1.75,1.75 0.75,1.75 ; 0.75,1.75 -0.25,1.75
L4.0-W4.0-CNDV-PAD#3 [mm] "Conductive Pad Switch"
  rect 0.5x0.5 smd paste-2539.97: 1(2.425,1.75) 2(2.375,-1.75)
  Top Layer lines w0.25: 2.425,1.75 -1.25,1.75 -1.25,-1.1 ; 2.375,-1.75 2.125,-1.75 -1.75,-1.75 -1.75,1.1 ; 1.75,-1.1 1.75,1.75 ; 1.25,-1.75 1.25,1.1 ; 0.75,-1.107 0.75,1.75 ; 0.25,-1.75 0.25,1.1 ; -0.25,-1.107 -0.25,1.75 ; -0.75,-1.75 -0.75,1.1
L4.0-W4.0-CNDV-PAD#4 [mm] "Conductive Pad Switch"
  rect 0.5x0.5 smd paste-2539.97: 1(2.425,1.75) 2(2.375,-1.75)
  Top Layer lines w0.25: 2.425,1.75 1.75,1.75 ; 2.375,-1.75 2.125,-1.75 -1.75,-1.75 -1.75,1.1 ; 1.75,-1.1 1.75,1.75 ; 1.25,-1.75 1.25,1.1 ; 0.75,-1.107 0.75,1.75 ; 0.25,-1.75 0.25,1.1 ; -0.25,-1.107 -0.25,1.75 ; -0.75,-1.75 -0.75,1.1 ; -1.25,-1.1 -1.25,1.734 -1.25,1.75 -1.089,1.75 -0.25,1.75 ; 1.75,1.75 0.75,1.75 ; 0.75,1.75 -0.25,1.75
LED_0603 [mm]
  rect 0.8x0.8 smd: 1(0,0.825) 2(0,-0.825)
  silkscreen extent -0.05,-1.7 0.05,-1.6, body extent -0.4,-0.8 0.4,0.8, height 0.55
RESC0402(1005)_L [mm] "Chip Resistor, Body 1.0x0.5mm, IPC High Density"
  rrect25% 0.5x0.55 smd: 1(-0.45,0) 2(0.45,0)
  silkscreen extent 0,-0.2 0,0.2, body extent -0.5,-0.25 0.5,0.25, height 0.3
SODFL1608X70N [mm]
  rect 0.64x0.42 smd: 1(-0.75,0) 2(0.75,0)
  silkscreen extent -1.07,-0.4 0.6,0.4, body extent -0.8,-0.4 0.8,0.4, height 0.7
SON65P200X200X80-7N-D [mm]
  rect 0.75x0.35 smd: 1(-1,0.65) 2(-1,0) 3(-1,-0.65) 4(1,-0.65) 5(1,0) 6(1,0.65)
  rect 0.65x1.45 smd: 7(0,0)
  silkscreen extent -1.5,1.2 -1.25,1.45, body extent -1.05,-1 1.05,1, height 0.8
SOTFL35P100X50-3N [mm]
  rect 0.36x0.33 smd: 1(-0.58,0.35) 2(-0.58,-0.35) 3(0.58,0)
  silkscreen extent -0.76,-0.5 0.05,0.76, body extent -0.5,-0.5 0.5,0.5, height 0.5
TP [mm]
  round 1.27 smd paste-2539.97: 1(0,0)

## Part data
C1 C2 C3 C4 C7 C8 C9 C10 C11 C13 C14 C16 C17 C19 C20 C21: library part CMP-001-00001-6, "Chip Capacitor, 0.1 uF, +/- 5%, 16 V, 0402 (1005 Metric)", Capacitor Type=Ceramic, Case/Package=0402, Max Operating Temperature=125°C, Min Operating Temperature=-55°C, Tolerance=5%, Voltage Rating=16V, Mounting Technology=SM, Pins=2, RoHS Compliant=True
C5 C6 C12 C18: library part CMP-001-00079-4, "Chip Capacitor, 10µF +/-20%, 25V, 0805, Thickness 1.45 mm", Case/Package=0805, Max Operating Temperature=85°C, Min Operating Temperature=-55°C, Tolerance=10%, Voltage Rating=25V, Mounting Technology=SMT, Pins=2
C15: library part TPSD157K016S0125, "Capacitor Polarised", Manufacturer_Name=AVX, Mouser Part Number=581-TPSD157K016S0125, Arrow Part Number=TPSD157K016S0125, Arrow Price/Stock=https://www.arrow.com/en/products/tajd157k016rnjv/avx, Datasheet Link=http://datasheets.avx.com/TAJ.pdf, Height=3.1mm, Manufacturer_Part_Number=TPSD157K016S0125, Mouser Price/Stock=https://www.mouser.co.uk/ProductDetail/AVX/TAJD157K016RNJV?qs=%252BZP6%2F%252BtExtCxiQ2tCar1OQ%3D%3D, Supplier 1=Mouser, Supplier Part Number 1=581-TPSD157K016S0125
CN1: library part 1-2199119-6, "M.2 PCIE KEY M Connector", Manufacturer_Name="TE Connectivity", Mouser Part Number=571-1-2199119-6, Arrow Part Number=1-2199119-6, Arrow Price/Stock=https://www.arrow.com/en/products/1-2199119-6/te-connectivity?region=nac, Datasheet Link=https://www.te.com/commerce/DocumentDelivery/DDEController?Action=showdoc&DocId=Customer+Drawing%7F2199119%7FF%7Fpdf%7FEnglish%7FENG_CD_2199119_F.pdf%7F1-2199119-6, Height=3.2mm, Manufacturer_Part_Number=1-2199119-6, Mouser Price/Stock=https://www.mouser.co.uk/ProductDetail/TE-Connectivity/1-2199119-6?qs=I%252B29QTDM1GM6Cv1M63DAwA%3D%3D, Supplier 1=Mouser, Supplier Part Number 1=571-1-2199119-6
CN2: library part CMP-00257-52963780-1, "503480-0540 Connector FFC/FPC SKT 5 Position 0.5mm Solder Right Angle Surface Mount T/R", Current Rating=500mA, Flammability Rating="UL94 V-0", Manufacturer Lifecycle Status=ACTIVE, Max Operating Temperature=85°C, Min Operating Temperature=-40°C, Voltage Rating=50V, Actuator Material="Glass, Nylon, Polyamide", Contact Material="Bronze, Gold, Nickel", Contact Plating=Gold, Country of Origin=KR, Halogen Free="Low Halogen", Height=2.07mm, Housing Material=Polymer, Lifecycle Status=Production, Mount="Surface Mount", NexarPartId=52963780, Number of Circuits=5, Number of Contacts=5, Number of Positions=5, Number of Rows=1, Orientation="Right Angle", Pitch=508µm, Plating=Gold, RoHS=Compliant, Termination=Solder, Wire/Cable Type=Straight
CN3: library part BM20B(0.8)-40DS-0.4V(51), "Connector", Manufacturer_Name=Hirose, Mouser Part Number=798-BM20B0840DS04V51, Datasheet Link=https://datasheet.datasheetarchive.com/originals/distributors/Datasheets-DGA17/1065509.pdf, Height=0.9mm, Manufacturer_Part_Number=BM20B(0.8)-40DS-0.4V(51), Mouser Price/Stock=https://www.mouser.co.uk/ProductDetail/Hirose-Connector/BM20B0.8-40DS-0.4V51?qs=AAveGqk956F9p8KJryTUVg%3D%3D, Supplier 1=Mouser, Supplier Part Number 1=798-BM20B0840DS04V51, System=Connector
CN4: library part 105017-0001, "Micro USB Connector", Manufacturer_Name=Molex, Mouser Part Number=538-105017-0001, Manufacturer_Part_Number=105017-0001, Supplier 1=Mouser, Supplier 2=Digikey, Supplier Part Number 1=538-105017-0001, Supplier Part Number 2=WM1399CT-ND
CN5: library part CMP-17439-000279-1, "LCSC_CONN HEADER SMD R/A 2POS 0.8MM", Color=Natural, Current Rating=500mA, Flammability Rating="UL94 V-0", Max Operating Temperature=85°C, Min Operating Temperature=-25°C, Voltage Rating=30V, Body Plating=Tin, Connector Type=Header, Contact Finish - Mating=TIN, Contact Material="Copper Alloy", Contact Plating=Tin, Contact Shape=Rectangular, Contact Type="Outer Shroud Contact", Fastening Type=Pull, Gender=Male, Insulation Color=Natural, Insulation Material=Nylon, Lead Free="Lead Free", Lead Pitch=0.8mm, Material=Polyamide, Mount="Surface Mount", Number of Contacts=2, Number of Poles=2, Number of Positions=2, Number of Rows=1, Orientation=Horizontal, Packaging="Cut Tape", Pitch=0.8mm, REACH SVHC="No SVHC", Series=SUR, Termination=Solder, Wire/Cable Gauge=32AWG, Working Voltage=30V
D1: "Integrated Circuit", Manufacturer_Name="Texas Instruments", Mouser Part Number=595-TPD2E009DRTR, Arrow Part Number=TPD2E009DRTR, Arrow Price/Stock=https://www.arrow.com/en/products/tpd2e009drtr/texas-instruments?region=nac, Datasheet Link=https://www.ti.com/lit/ds/symlink/tpd2e009.pdf?ts=1621336941637&ref_url=https%253A%252F%252Fwww.google.com%252F, Height=0.5mm, Manufacturer_Part_Number=TPD2E009DRTR, Mouser Price/Stock=https://www.mouser.co.uk/ProductDetail/Texas-Instruments/TPD2E009DRTR?qs=XGzIaZb%2FFYLhG8oL%2FM05Rg%3D%3D
D2 D3 D4: "Diode", Manufacturer_Name=onsemi, Mouser Part Number=863-1SS400T1G, Arrow Part Number=1SS400T1G, Arrow Price/Stock=https://www.arrow.com/en/products/1ss400t1g/on-semiconductor?region=nac, Datasheet Link=http://www.onsemi.com/pub/Collateral/1SS400T1-D.PDF, Height=0.7mm, Manufacturer_Part_Number=1SS400T1G, Mouser Price/Stock=https://www.mouser.co.uk/ProductDetail/onsemi/1SS400T1G?qs=vLkC5FC1VN8%2F6DEK%2F5shrw%3D%3D, Supplier 1=Mouser, Supplier Part Number 1=863-1SS400T1G
LED1: library part BZ-C0603-K4-E1, MPN=BZ-C0603-K4-E1
LED2: library part CMP-2100-03578-1, "Chip LED, Red, 5 V, 25 mA, -40 to 85 degC, 2-Pin SMD (0603), RoHS, Tape and Reel", Case/Package=0603, Color=Red, Forward Current=25mA, Forward Voltage=2.2V, Manufacturer="Everlight Electronics", Manufacturer Part Number=19-217/R6C-AL1M2VY/3T, Max Operating Temperature=85°C, Min Operating Temperature=-40°C, Package Description="2-Pin Surface Mount Device, Body 1.6 x 0.8 mm", Supplier Part Number=1080-1585-6-ND, Category=LEDs, Channels=1, Colour=Red, ComponentLink1Description=https://datasheet.ciiva.com:443/pdfs/VipMasterIC/IC/EVER/EVER-S-A0007433843/EVER-S-A0007433843-1.pdf?src-supplier=IHS+Markit, ComponentLink1URL=https://datasheet.ciiva.com:443/pdfs/VipMasterIC/IC/EVER/EVER-S-A0007433843/EVER-S-A0007433843-1.pdf?src-supplier=IHS+Markit, ComponentLink2Description=https://media.digikey.com/pdf/Data%20Sheets/Everlight%20PDFs/19-217-R6C-AL1M2VY-3T.pdf?src-supplier=Digikey, ComponentLink2URL=https://media.digikey.com/pdf/Data%20Sheets/Everlight%20PDFs/19-217-R6C-AL1M2VY-3T.pdf?src-supplier=Digikey, Datasheet URL=https://datasheet.ciiva.com/4688/el-19-217-r6c-al1m2vy-3tpdf-187026-4688713.pdf, Datasheet Version="Rev. 1, 01/2005", Lead Free=LeadFree, Lens Style=Clear, Luminous Intensity-Nom=20mcd, Manufacturer URL=http://www.everlight.com/, Mounting Technology="Surface Mount", Optoelectronic Device Type="SINGLE COLOR LED", Overall Height=0.4mm, Package Reference=0603, Packaging="Tape and Reel", Pins=2, Reach SVHC Compliant=Yes, RoHS=Yes, RoHS Compliant=Yes, RoHSCompliant=false, Shape=Rectangular, Size=1mm, Supplier=Digikey, Terminal Pitch=1.5mm, Viewing Angle=120°
Q1 Q2 Q3: library part CMP-2000-07450-1, "N-Channel Enhancement Mode MOSFET, 20 V, 630 mA, -55 to 150 degC, 3-Pin SOT23, RoHS, Tape and Reel", Case\/Package=SOT-523, Continuous Drain Current (ID)=630mA, Drain to Source Breakdown Voltage=20V, Drain to Source Resistance=300mOhm, Gate to Source Voltage (Vgs)=6V, Input Capacitance=60.67pF, Manufacturer="Diodes Inc", Max Operating Temperature=150degC, Max Power Dissipation=280mW, Min Operating Temperature=-55degC, On-State Resistance=400MOhm, Package Description="3-Pin Small Outline Transistor, Body 1.6 x 0.8 mm, Pitch 0.5 mm", Package Quantity=3000, Package Reference=SOT523-3, Threshold Voltage=1V, Contact Plating=Matte, Datasheet URL=https://www.diodes.com/assets/Datasheets/ds31783.pdf, Datasheet Version="Rev. 3-2, 01/2012", Drain to Source Voltage (Vdss)=20V, Element Configuration=Single, Fall Time=12.3ns, Height=0.8mm, Lead Free=LeadFree, Length=1.7mm, Manufacturer URL=http://www.diodes.com/, Mount=SurfaceMount, Mounting Technology=SurfaceMount, Number Of Channels=1, Number Of Elements=1, Number of Pins=3, Packaging=TapeandReel, Power Dissipation=280mW, Radiation Hardening=No, Rds On Max=400mOhm, REACH SVHC=NoSVHC, Rise Time=7.4ns, RoHSCompliant=true, Turn-Off Delay Time=26.7ns, Turn-On Delay Time=5.1ns, Weight=7.1E-05oz, Width=0.85mm
Q4: library part CMP-20235-000001-1, "NPN TRANSISTOR 1.5A 40V SOT-23 R", Case/Package=TO-236-3, Collector Emitter Breakdown Voltage=25V, Collector Emitter Voltage (VCEO)=400mV, Max Collector Current=1.5A, Max Power Dissipation=300mW, Transition Frequency=100MHz, Max Breakdown Voltage=25V, Mount="Surface Mount", Packaging="Tape and Reel", RoHS Compliant=Yes
R1 R6 R15: library part CMP-009-00138-3, "Chip Resistor, 1 kOhms, +/-5 %, 63 mW, -55 to 155 degC, 0402", Case/Package=0402, Max Operating Temperature=155°C, Min Operating Temperature=-55°C, Power=63mW, Tolerance=5%, Pins=2
R2 R5: library part CMP-009-00138-3, "Chip Resistor, 2.2 kOhms, +/-5 %, 63 mW, -55 to 155 degC, 0402", Case/Package=0402, Max Operating Temperature=155°C, Min Operating Temperature=-55°C, Power=63mW, Tolerance=5%, Pins=2
R3 R9 R10 R13 R14 R16: library part CMP-009-00138-3, "Chip Resistor, 10 kOhms, +/-5 %, 63 mW, -55 to 155 degC, 0402", Case/Package=0402, Max Operating Temperature=155°C, Min Operating Temperature=-55°C, Power=63mW, Tolerance=5%, Pins=2
R4 R8: library part CMP-009-00138-3, "Chip Resistor, 33 Ohms, +/-5 %, 63 mW, -55 to 155 degC, 0402", Case/Package=0402, Max Operating Temperature=155°C, Min Operating Temperature=-55°C, Power=63mW, Tolerance=5%, Pins=2
R7: library part CMP-009-00138-3, "Chip Resistor, 1 Ohm, +/-5 %, 63 mW, -55 to 155 degC, 0402", Case/Package=0402, Max Operating Temperature=155°C, Min Operating Temperature=-55°C, Power=63mW, Tolerance=5%, Pins=2
R11: library part CMP-009-00138-3, "Chip Resistor, 1 MOhms, +/-5 %, 63 mW, -55 to 155 degC, 0402", Case/Package=0402, Max Operating Temperature=155°C, Min Operating Temperature=-55°C, Power=63mW, Tolerance=5%, Pins=2
R12: library part CMP-009-00138-3, "Chip Resistor, 100 kOhms, +/-5 %, 63 mW, -55 to 155 degC, 0402", Case/Package=0402, Max Operating Temperature=155°C, Min Operating Temperature=-55°C, Power=63mW, Tolerance=5%, Pins=2
SW1: library part APTCLGTVTR, "Switch", Manufacturer_Name=Apem, Mouser Part Number=642-APTCLGTVTR, Datasheet Link=https://media.digikey.com/pdf/Data%20Sheets/APEM%20Components%20PDFs/APTCLGTV.pdf, Height=1.87mm, Manufacturer_Part_Number=APTCLGTVTR, Mouser Price/Stock=https://www.mouser.co.uk/ProductDetail/Apem/APTCLGTVTR?qs=ikKlZSMjbcRNf%252Bwzp31ctg%3D%3D
SW2: library part APTCLGTVTR_NH, "Switch", Manufacturer_Name=Apem, Manufacturer_Part_Number=APTCLGTVTR, Mouser Part Number=642-APTCLGTVTR, Datasheet Link=https://media.digikey.com/pdf/Data%20Sheets/APEM%20Components%20PDFs/APTCLGTV.pdf, Height=1.87mm, Mouser Price/Stock=https://www.mouser.co.uk/ProductDetail/Apem/APTCLGTVTR?qs=ikKlZSMjbcRNf%252Bwzp31ctg%3D%3D, Supplier 1=Mouser, Supplier Part Number 1=642-APTCLGTVTR
SW3 SW6: library part EVQ-Q2B03W, "Switch", Manufacturer_Name=Panasonic, Mouser Part Number=667-EVQ-Q2B03W, Arrow Part Number=EVQ-Q2B03W, Arrow Price/Stock=https://www.arrow.com/en/products/evq-q2b03w/panasonic, Datasheet Link=https://industrial.panasonic.com/cdbs/www-data/pdf/ATK0000/ATK0000C360.pdf, Manufacturer_Part_Number=EVQ-Q2B03W, Mouser Price/Stock=https://www.mouser.co.uk/ProductDetail/Panasonic/EVQ-Q2B03W?qs=WwqriLBepZtuDDVMSV2X%252BA%3D%3D, Supplier 1=Mouser, Supplier Part Number 1=667-EVQ-Q2B03W
SW4 SW5 SW7 SW8: library part CNDV_SW, "Conductive Pad Switch"
TP1 TP2: library part TestPoint, "TestPoint"
U1: "Integrated Circuit", Manufacturer_Name="Diodes Incorporated", Mouser Part Number=621-AP22653FDZ-7, Arrow Part Number=AP22653FDZ-7, Arrow Price/Stock=https://www.arrow.com/en/products/ap22653fdz-7/diodes-incorporated?region=asia, Datasheet Link=https://www.diodes.com//assets/Datasheets/AP22652_53_52A_53A.pdf, Height=0.8mm, Manufacturer_Part_Number=AP22653FDZ-7, Mouser Price/Stock=https://www.mouser.co.uk/ProductDetail/Diodes-Incorporated/AP22653FDZ-7?qs=rkhjVJ6%2F3EKOkUb%252BFuGsGg%3D%3D, Supplier 1=Mouser, Supplier Part Number 1=621-AP22653FDZ-7
U2: "Integrated Circuit", Manufacturer_Name="Diodes Incorporated", Mouser Part Number=621-74LVC1G3157FZ4-7, Arrow Part Number=74LVC1G3157FZ4-7, Arrow Price/Stock=https://www.arrow.com/en/products/74lvc1g3157fz4-7/diodes-incorporated?region=nac, Datasheet Link=https://www.diodes.com//assets/Datasheets/74LVC1G3157.pdf, Height=0.4mm, Manufacturer_Part_Number=74LVC1G3157FZ4-7, Mouser Price/Stock=https://www.mouser.co.uk/ProductDetail/Diodes-Incorporated/74LVC1G3157FZ4-7?qs=xLhQT1EE4V8lLw6YU9%2F78g%3D%3D, Supplier 1=Mouser, Supplier Part Number 1=621-74LVC1G3157FZ4-7
X1: "Crystal or Oscillator", Manufacturer_Name=ECS, Mouser Part Number=520-ECS-327KE-TR, Arrow Part Number=ECS-327KE-TR, Arrow Price/Stock=https://www.arrow.com/en/products/ecs-327ke-tr/ecs-international, Datasheet Link=https://componentsearchengine.com/Datasheets/2/ECS-327KE-TR.pdf, Height=1mm, Manufacturer_Part_Number=ECS-327KE-TR, Mouser Price/Stock=https://www.mouser.co.uk/ProductDetail/ECS/ECS-327KE-TR?qs=4WriyvGnMNpSLLD8vPgMbw%3D%3D, Supplier 1=Mouser, Supplier Part Number 1=520-ECS-327KE-TR

## Free pads (board coordinates)
  round 3 hole 2.032 paste-2539.97 mask+0.038: 3(64.779,37.1) 3(64.779,97.366) 3(94.236,54.29) 3(94.236,94.299)

## Via types
v1: diameter 0.45, hole 0.2, Top Layer to Bottom Layer, tented both sides, 262 vias

## Nets (pads, with @x,y where several pads share a name; then routed paths per layer and width w, separated by ;. In a path a pad name is that pad's centre, name@x,y a point inside that pad or via, vN(x,y) a via of type N, cw(c..) or ccw(c..) an arc to the next point about the centre after c; other vN are vias at no path point)
+3V3: C7.1 C14.1 C17.1 C18.1 C21.1 CN2.1 CN3.1 CN3.3 CN3.5 CN3.7 CN5.1 D2.1 R2.1 TP1.1 U1.6 U2.5 | length 10.8
  Top Layer w0.15: CN3.7@66.272,50.866 67.916,50.866
  Top Layer w0.2: CN3.7@66.175,50.925 66.175,51.969 CN3.1@66.272,52.066 ; CN3.7@66.272,50.925 CN3.5@66.272,51.266 ; 67.916,50.866 68.075,51.025
  Top Layer w0.25: U2.5@73.425,76.151 C21.1@73.425,77.065
  Top Layer w0.35: C17.1@87.3,75.2 87.4,75.1 U1.6@87.4,74.125
  Top Layer w0.45: C21.1@73.425,77.15 v1(73.425,77.8)
  Top Layer w0.5: D2.1@68.6,101.8 v1(70.4,101.8) ; C14.1@69.6,102.556 71.471,102.556 CN5.1@71.501,102.556 ; 78.5,53 78.525,53.025 R2.1@78.525,54
  other v1: 83.425,51.775 84.15,51.775 84.85,51.775 83.425,52.475 84.15,52.475 84.85,52.475 83.425,53.175 84.15,53.175 84.85,53.175 85.6,75.5 86.3,75.5 93.4,75.6 94.2,75.6 85.6,76.2 86.3,76.2 94.2,76.3 85.6,76.9 86.3,76.9 94.2,77 71.1,101.8 71.8,101.8
+3V3_M2: C1.1 C2.1 C3.1 C4.1 C5.1 C6.1 C8.1 C9.1 C10.1 C11.1 C12.1 C15.1 C16.1 CN1.2 CN1.4 CN1.12 CN1.14 CN1.16 CN1.18 CN1.70 CN1.72 CN1.74 D3.2 D4.2 LED1.1 LED2.1 R3.1 R7.1 R9.1 R14.2 TP2.1 U1.1 | length 64.9
  Top Layer w0.15: R3.1@70.575,70.225 70.575,72.125 ; 74.175,72.15 D4.2@74.175,73.15 74.175,73.575 74.646,74.046 R14.2@74.646,74.521 ; v1(75.2,57.6) 75.2,57.519 75.4,57.319 R9.1@75.4,56.65 ; v1(75.2,63.7) 77.5,66 79.112,66 79.69,66.578 CN1.18@79.69,67.924 ; TP2.1@95.8,56.3 95.8,56.603 96.143,56.946 96.143,57.143 v1(96.2,57.2)
  Top Layer w0.25: R14.2@74.646,74.521 R14.2@74.65,74.525
  Top Layer w0.3: 79.65,69.175 79.69,69.135 CN1.18@79.69,67.924 ; CN1.12@81.19,67.924 81.19,69.065 81.3,69.175 ; 83.19,68.985 CN1.4@83.19,67.924 83.19,66.66 83.3,66.55 ; C15.1@88.575,65.4 88.65,65.4 89.65,64.4 89.65,62.9 v1(90.95,61.6)
  Top Layer w0.4: 82.225,69.175 83,69.175 83.19,68.985
  Top Layer w0.5: v1(64.425,69.9) 65.175,69.9 65.275,69.8 C3.1@67.125,69.8 ; C3.1@67.125,69.835 67.129,69.839 67.129,69.899 67.145,69.915 67.682,69.915 67.975,70.208 67.975,71.35 68.775,72.15 74.175,72.15 75.7,72.15 76.355,71.495 76.685,71.495 76.725,71.455 D3.2@76.725,71.425 76.765,71.384 77.331,71.384 78.84,69.875 C4.1@79.525,69.875 ; v1(96.025,65.675) LED1.1@96.05,65.675 ; LED1.1@96.05,65.7 LED2.1@96.05,66.75
  Bottom Layer w0.15: v1(75.2,57.6) v1(75.2,63.7) ; v1(96.025,65.675) 96.35,65.35 96.35,57.431 96.2,57.281 v1(96.2,57.2)
  Bottom Layer w0.3: v1(90.95,61.6) 91.95,61.6 v1(96.025,65.675)
  other v1: 65.025,69.05 63.7,69.9
DOWN: CN3.31 SW5.1 | length 25.6
  Top Layer w0.15: CN3.31@66.272,46.066 66.282,46.056 68.344,46.056 70.4,44 v1(70.4,43.325)
  Bottom Layer w0.15: v1(70.4,43.325) 70.481,43.325 70.75,43.594 70.75,48.475 73.875,51.6 75.475,51.6 76.9,53.025 76.9,58.05 77.511,58.661 SW5.1@77.511,59.366
E2_N: CN3.36 CN4.2 D1.2 | length 20.5
  Top Layer w0.118: CN3.36@64.092,45.266 64.383,45.266 64.469,45.352 64.587,45.352 65.05,44.889 65.05,39.953 69.106,35.897 71.203,35.897 71.446,35.654 D1.2@71.76,35.654 ; D1.2@71.745,35.654 71.807,35.592 72.033,35.592 72.2,35.425 73.175,35.425 73.647,35.897 74.978,35.897 75.55,35.325 75.55,34.753 75.342,34.545 CN4.2@75.342,33.811
E2_P: CN3.34 CN4.3 D1.1 | length 20.9
  Top Layer w0.118: CN3.34@64.092,45.666 64.383,45.666 64.469,45.58 64.681,45.58 65.278,44.983 65.278,40.047 69.2,36.125 71.225,36.125 71.454,36.354 D1.1@71.76,36.354 ; D1.1@71.745,36.354 71.82,36.429 72.029,36.429 72.175,36.575 73.2,36.575 73.65,36.125 75.072,36.125 75.139,36.058 75.778,35.419 75.778,34.759 75.992,34.545 CN4.3@75.992,33.811